# Altium PCB PCB_V2.PcbDoc
Units mm, origin at the board's own origin, x right, y up, seen from the top; angles counter-clockwise.
Board outline 76.5 x 99.5 mm, 2 copper layers (Top Layer, Bottom Layer), stack 0.08 mm thick; 12 components, 10 nets, 39 pads, 30 vias.
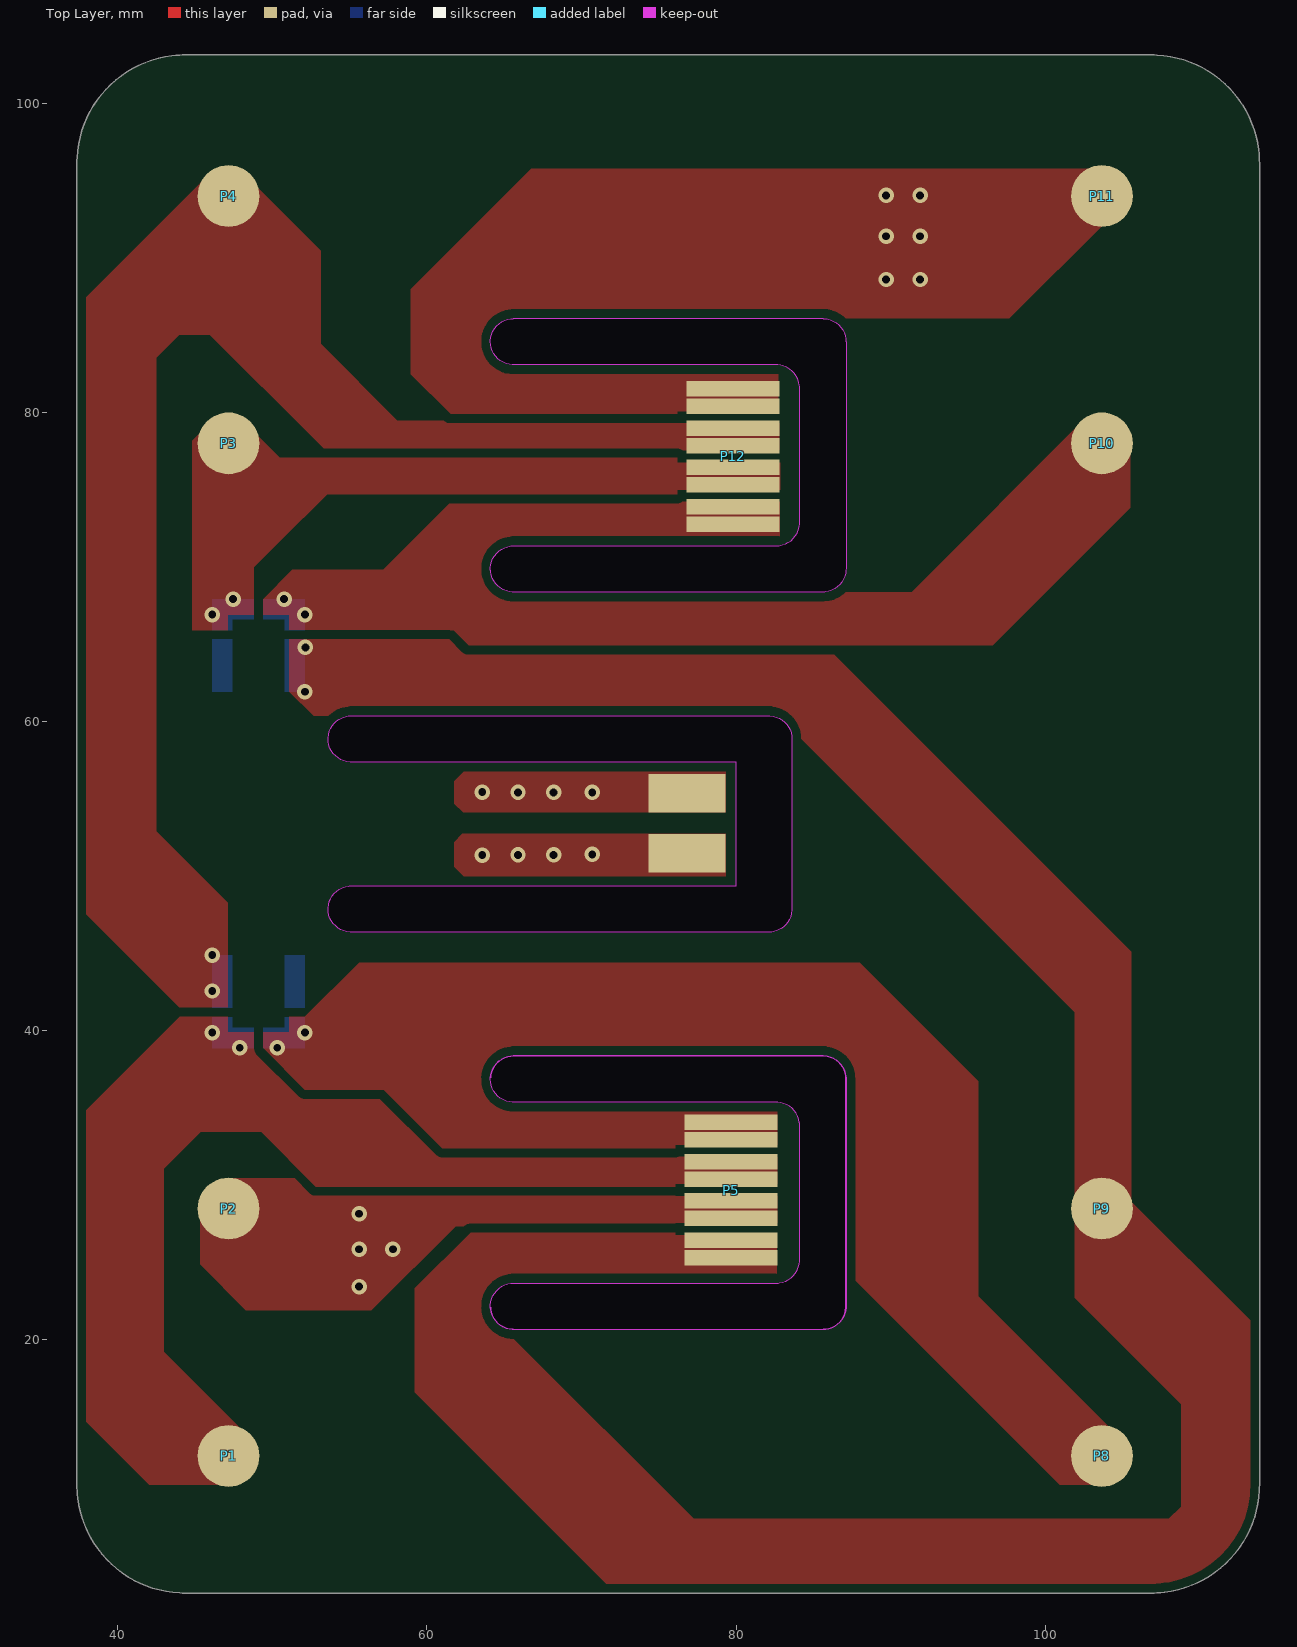
[diagram p0: Top Layer view]
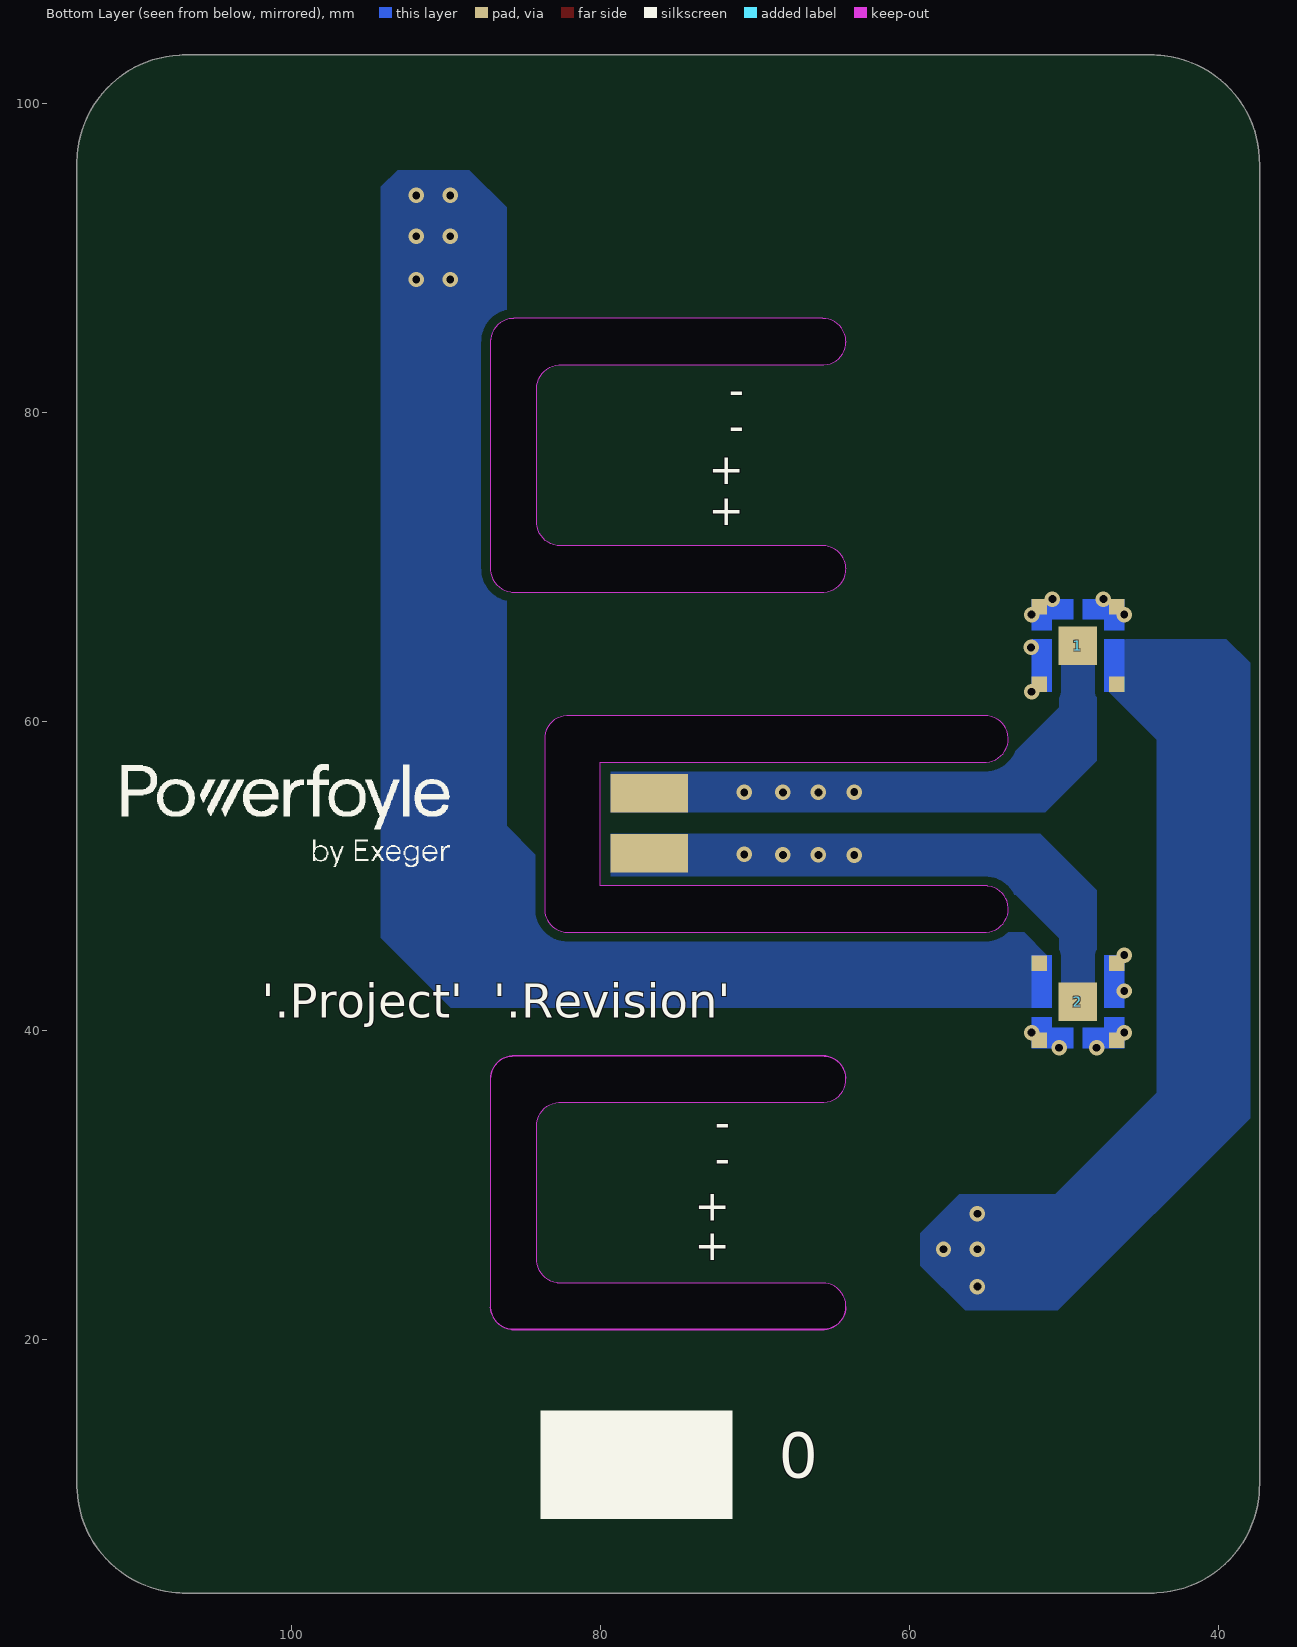
[diagram p1: Bottom Layer view, seen from below]

## Layer stack, top to bottom
Top Solder: solder mask 0.0102, Solder Resist, Dk 3.5
Top Layer: signal copper 0.035
Dielectric 1: dielectric 0.01, Kapton, Dk 4.8
Bottom Layer: signal copper 0.035
Bottom Solder: solder mask 0.0102, Solder Resist, Dk 3.5

## Board outline
37.41,9.771 cw(c44.399,10.623) 37.368,10.258 cw(c44.472,10.627) 37.358,10.627 37.358,96.127 cw(c44.474,96.127) 37.367,96.484 cw(c44.36,96.126) 43.502,103.075 cw(c44.354,96.086) 43.989,103.117 cw(c44.358,96.013) 44.358,103.127 106.858,103.127 cw(c106.859,96.012) 107.216,103.118 cw(c106.857,96.125) 113.806,96.983 cw(c106.818,96.131) 113.849,96.496 cw(c106.744,96.127) 113.858,96.127 113.858,10.627 cw(c106.743,10.627) 113.849,10.27 cw(c106.857,10.628) 107.715,3.679 cw(c106.863,10.668) 107.227,3.637 cw(c106.859,10.741) 106.858,3.627 44.358,3.627 cw(c44.358,10.742) 44.001,3.636 cw(c44.359,10.629)
cut-out: 64.119,21.993 cw(c65.617,22.176) 64.11,22.098 64.11,22.254 cw(c65.609,22.177) 65.425,23.666 cw(c65.607,22.168) 65.529,23.675 cw(c65.608,22.153) 65.608,23.677 82.608,23.677 ccw(c82.608,25.201) 82.687,23.679 ccw(c82.609,25.186) 82.792,23.688 ccw(c82.608,25.177) 84.106,25.1 ccw(c82.584,25.177) 84.108,25.177 84.108,33.877 ccw(c82.584,33.877) 84.106,33.956 ccw(c82.6,33.878) 84.097,34.061 ccw(c82.608,33.877) 82.685,35.375 ccw(c82.608,33.852) 82.608,35.377 65.608,35.377 cw(c65.608,36.902) 65.532,35.379 cw(c65.608,36.877) 64.119,36.693 cw(c65.617,36.876) 64.11,36.798 64.11,36.954 cw(c65.609,36.877) 65.425,38.366 cw(c65.607,36.868) 65.529,38.375 cw(c65.608,36.853) 65.608,38.377 85.608,38.377 cw(c85.608,36.852) 85.685,38.375 cw(c85.608,36.877) 87.097,37.061 cw(c85.6,36.878) 87.106,36.956 cw(c85.584,36.877) 87.108,36.877 87.108,22.177 cw(c85.584,22.177) 87.106,22.1 cw(c85.608,22.177) 85.792,20.688 cw(c85.609,22.186) 85.687,20.679 cw(c85.608,22.201) 85.608,20.677 65.608,20.677 cw(c65.608,22.202) 65.532,20.679 cw(c65.608,22.177)
cut-out: 65.531,20.672 cw(c65.608,22.177) 64.113,21.993 cw(c64.119,21.993) 64.113,21.993 cw(c65.617,22.176) 64.104,22.098 cw(c64.11,22.098) 64.117,22.098 ccw(c65.617,22.176) 64.126,21.994 ccw(c65.617,22.176) 64.126,21.994 ccw(c64.119,21.993) 64.126,21.994 ccw(c65.608,22.177) 65.532,20.686 ccw(c65.608,22.177) 65.532,20.686 ccw(c65.608,22.202) 65.608,20.684 cw(c65.608,20.677) 65.608,20.684 85.608,20.684 ccw(c85.608,22.201) 85.687,20.686 ccw(c85.608,22.201) 85.687,20.686 cw(c85.687,20.679) 85.687,20.686 ccw(c85.609,22.186) 85.791,20.695 cw(c85.792,20.688) 85.791,20.695 ccw(c85.608,22.177) 87.1,22.101 ccw(c85.608,22.177) 87.1,22.101 ccw(c85.584,22.177) 87.102,22.177 ccw(c85.584,22.177) 87.102,22.177 cw(c87.108,22.177) 87.102,22.177 87.102,36.877 ccw(c85.584,36.877) 87.102,36.877 ccw(c85.584,36.877) 87.099,36.956 cw(c87.106,36.956) 87.099,36.956 cw(c87.106,36.956) 87.099,36.956 ccw(c85.6,36.878) 87.09,37.06 cw(c87.097,37.061) 87.09,37.06 ccw(c85.608,36.877) 85.684,38.368 cw(c85.685,38.375) 85.684,38.368 cw(c85.608,36.852) 85.684,38.368 ccw(c85.608,36.852) 85.608,38.37 ccw(c85.608,36.852) 85.608,38.37 65.608,38.37 cw(c65.608,36.853) 65.608,38.37 ccw(c65.608,36.853) 65.53,38.368 cw(c65.529,38.375) 65.529,38.368 cw(c65.607,36.868) 65.53,38.368 65.529,38.368 ccw(c65.607,36.868) 65.426,38.359 ccw(c65.607,36.868) 65.426,38.359 ccw(c65.425,38.366) 65.426,38.359 ccw(c65.609,36.877) 64.117,36.953 cw(c64.11,36.954) 64.103,36.954 cw(c65.609,36.877) 65.424,38.373 cw(c65.425,38.366) 65.424,38.373 cw(c65.607,36.868) 65.529,38.382 cw(c65.608,36.853) 65.608,38.384 85.608,38.384 cw(c85.608,36.852) 85.685,38.382 cw(c85.685,38.375) 85.685,38.382 cw(c85.608,36.877) 87.104,37.061 cw(c87.097,37.061) 87.104,37.061 cw(c85.6,36.878) 87.113,36.956 cw(c85.584,36.877) 87.115,36.877 cw(c85.584,36.877) 87.115,36.877 87.115,22.177 cw(c87.108,22.177) 87.115,22.177 ccw(c85.584,22.177) 87.115,22.177 ccw(c85.584,22.177) 87.115,22.177 cw(c85.584,22.177) 87.113,22.1 ccw(c87.106,22.1) 87.113,22.1 cw(c87.106,22.1) 87.113,22.1 cw(c85.608,22.177) 85.793,20.681 cw(c85.792,20.688) 85.793,20.681 cw(c85.609,22.186) 85.688,20.672 cw(c85.608,22.201) 85.608,20.67 65.608,20.67 cw(c65.608,20.677) 65.608,20.67 ccw(c65.608,22.202) 65.608,20.67 cw(c65.608,22.202)
cut-out: 65.531,20.672 cw(c65.608,22.177) 64.113,21.993 cw(c64.119,21.993) 64.113,21.993 cw(c65.617,22.176) 64.104,22.098 cw(c64.11,22.098) 64.117,22.098 ccw(c65.617,22.176) 64.126,21.994 ccw(c65.617,22.176) 64.126,21.994 ccw(c64.119,21.993) 64.126,21.994 ccw(c65.608,22.177) 65.532,20.686 ccw(c65.608,22.177) 65.532,20.686 ccw(c65.608,22.202) 65.608,20.684 cw(c65.608,20.677) 65.608,20.684 85.608,20.684 ccw(c85.608,22.201) 85.687,20.686 ccw(c85.608,22.201) 85.687,20.686 cw(c85.687,20.679) 85.687,20.686 ccw(c85.609,22.186) 85.791,20.695 cw(c85.792,20.688) 85.791,20.695 ccw(c85.608,22.177) 87.1,22.101 ccw(c85.608,22.177) 87.1,22.101 ccw(c85.584,22.177) 87.102,22.177 ccw(c85.584,22.177) 87.102,22.177 cw(c87.108,22.177) 87.102,22.177 87.102,36.877 ccw(c85.584,36.877) 87.102,36.877 ccw(c85.584,36.877) 87.099,36.956 cw(c87.106,36.956) 87.099,36.956 cw(c87.106,36.956) 87.099,36.956 ccw(c85.6,36.878) 87.09,37.06 cw(c87.097,37.061) 87.09,37.06 ccw(c85.608,36.877) 85.684,38.368 cw(c85.685,38.375) 85.684,38.368 cw(c85.608,36.852) 85.684,38.368 ccw(c85.608,36.852) 85.608,38.37 ccw(c85.608,36.852) 85.608,38.37 65.608,38.37 cw(c65.608,36.853) 65.608,38.37 ccw(c65.608,36.853) 65.53,38.368 cw(c65.529,38.375) 65.529,38.368 cw(c65.607,36.868) 65.53,38.368 65.529,38.368 ccw(c65.607,36.868) 65.426,38.359 ccw(c65.607,36.868) 65.426,38.359 ccw(c65.425,38.366) 65.426,38.359 ccw(c65.609,36.877) 64.117,36.953 cw(c64.11,36.954) 64.103,36.954 cw(c65.609,36.877) 65.424,38.373 cw(c65.425,38.366) 65.424,38.373 cw(c65.607,36.868) 65.529,38.382 cw(c65.608,36.853) 65.608,38.384 85.608,38.384 cw(c85.608,36.852) 85.685,38.382 cw(c85.685,38.375) 85.685,38.382 cw(c85.608,36.877) 87.104,37.061 cw(c87.097,37.061) 87.104,37.061 cw(c85.6,36.878) 87.113,36.956 cw(c85.584,36.877) 87.115,36.877 cw(c85.584,36.877) 87.115,36.877 87.115,22.177 cw(c87.108,22.177) 87.115,22.177 ccw(c85.584,22.177) 87.115,22.177 ccw(c85.584,22.177) 87.115,22.177 cw(c85.584,22.177) 87.113,22.1 ccw(c87.106,22.1) 87.113,22.1 cw(c87.106,22.1) 87.113,22.1 cw(c85.608,22.177) 85.793,20.681 cw(c85.792,20.688) 85.793,20.681 cw(c85.609,22.186) 85.688,20.672 cw(c85.608,22.201) 85.608,20.67 65.608,20.67 cw(c65.608,20.677) 65.608,20.67 ccw(c65.608,22.202) 65.608,20.67 cw(c65.608,22.202)
cut-out: 53.619,47.693 cw(c55.117,47.876) 53.61,47.798 cw(c55.133,47.877) 53.608,47.877 cw(c55.133,47.877) 53.61,47.954 cw(c55.109,47.877) 54.925,49.366 cw(c55.107,47.868) 55.029,49.375 cw(c55.108,47.853) 55.108,49.377 80.008,49.377 80.008,57.377 55.108,57.377 cw(c55.108,58.902) 55.032,57.379 cw(c55.108,58.877) 53.619,58.693 cw(c55.117,58.876) 53.61,58.798 cw(c55.133,58.877) 53.608,58.877 cw(c55.133,58.877) 53.61,58.954 cw(c55.109,58.877) 54.925,60.366 cw(c55.107,58.868) 55.029,60.375 cw(c55.108,58.853) 55.108,60.377 82.108,60.377 cw(c82.108,58.852) 82.185,60.375 cw(c82.108,58.877) 83.597,59.061 cw(c82.1,58.878) 83.606,58.956 cw(c82.084,58.877) 83.608,58.877 83.608,47.877 cw(c82.084,47.877) 83.606,47.8 cw(c82.108,47.877) 82.292,46.388 cw(c82.109,47.886) 82.187,46.379 cw(c82.108,47.901) 82.108,46.377 55.108,46.377 cw(c55.108,47.902) 55.032,46.379 cw(c55.108,47.877)
cut-out: 64.11,69.798 cw(c65.633,69.877) 64.108,69.877 cw(c65.633,69.877) 64.11,69.954 cw(c65.609,69.877) 65.425,71.366 cw(c65.607,69.868) 65.529,71.375 cw(c65.608,69.853) 65.608,71.377 82.608,71.377 ccw(c82.608,72.901) 82.687,71.379 ccw(c82.609,72.886) 82.792,71.388 ccw(c82.608,72.877) 84.106,72.8 ccw(c82.584,72.877) 84.108,72.877 84.108,81.577 ccw(c82.584,81.577) 84.106,81.656 ccw(c82.6,81.578) 84.097,81.761 ccw(c82.608,81.577) 82.685,83.075 ccw(c82.608,81.552) 82.608,83.077 65.608,83.077 cw(c65.608,84.602) 65.532,83.079 cw(c65.608,84.577) 64.119,84.393 cw(c65.617,84.576) 64.11,84.498 cw(c65.633,84.577) 64.108,84.577 cw(c65.633,84.577) 64.11,84.654 cw(c65.609,84.577) 65.425,86.066 cw(c65.607,84.568) 65.529,86.075 cw(c65.608,84.553) 65.608,86.077 85.608,86.077 cw(c85.608,84.552) 85.685,86.075 cw(c85.608,84.577) 87.097,84.761 cw(c85.6,84.578) 87.106,84.656 cw(c85.584,84.577) 87.108,84.577 87.108,69.877 cw(c85.584,69.877) 87.106,69.8 cw(c85.608,69.877) 85.792,68.388 cw(c85.609,69.886) 85.687,68.379 cw(c85.608,69.901) 85.608,68.377 65.608,68.377 cw(c65.608,69.902) 65.532,68.379 cw(c65.608,69.877) 64.119,69.693 cw(c65.617,69.876)

## Design rules (kind name [scope] priority, off if disabled: settings)
BoardOutlineClearance [All] p1: gap=0.6 ignorepadtopadclearanceinfootprint=FALSE
Clearance "Clearance to footprint" [HasFootprint('Customer_2022_solder_short_ISOL_0.4_S') OR HasFootprint('Customer_2026_solder_short_ISOL_0.4') OR HasFootprint('EXEGER_IV_10_PIN_ISOL_0.4')] p1: gap=0.4 ignorepadtopadclearanceinfootprint=FALSE
Clearance "Clearance to cell connections" [HasFootprint('Cell_pad_4mm_SM0.5mm')] p2: gap=0.6 ignorepadtopadclearanceinfootprint=FALSE
Clearance [All] p3: gap=0.6 ignorepadtopadclearanceinfootprint=FALSE
DiffPairsRouting [All] p1: maxlimit=0.254 minlimit=0.254 mostfreqgap=0.254 substack1={AC398A8C-2EBD-4929-A576-1C4F7B57599D} toplayer_{ac398a8c-2ebd-4929-a576-1c4f7b57599d}_minwidth=0.381 toplayer_{ac398a8c-2ebd-4929-a576-1c4f7b57599d}_maxwidth=0.381 toplayer_{ac398a8c-2ebd-4929-a576-1c4f7b57599d}_prefwidth=0.381 bottomlayer_{ac398a8c-2ebd-4929-a576-1c4f7b57599d}_minwidth=0.381 bottomlayer_{ac398a8c-2ebd-4929-a576-1c4f7b57599d}_maxwidth=0.381 bottomlayer_{ac398a8c-2ebd-4929-a576-1c4f7b57599d}_prefwidth=0.381 substack2={C3FBE846-BD83-49AA-845B-1BEE8A776ADA} toplayer_{c3fbe846-bd83-49aa-845b-1bee8a776ada}_minwidth=0.381 toplayer_{c3fbe846-bd83-49aa-845b-1bee8a776ada}_maxwidth=0.381 toplayer_{c3fbe846-bd83-49aa-845b-1bee8a776ada}_prefwidth=0.381 bottomlayer_{c3fbe846-bd83-49aa-845b-1bee8a776ada}_minwidth=0.381 bottomlayer_{c3fbe846-bd83-49aa-845b-1bee8a776ada}_maxwidth=0.381 bottomlayer_{c3fbe846-bd83-49aa-845b-1bee8a776ada}_prefwidth=0.381 substack3={068A34C2-B61F-40AE-8550-B44704E20CBD} toplayer_{068a34c2-b61f-40ae-8550-b44704e20cbd}_minwidth=0.381 toplayer_{068a34c2-b61f-40ae-8550-b44704e20cbd}_maxwidth=0.381 toplayer_{068a34c2-b61f-40ae-8550-b44704e20cbd}_prefwidth=0.381 bottomlayer_{068a34c2-b61f-40ae-8550-b44704e20cbd}_minwidth=0.381 bottomlayer_{068a34c2-b61f-40ae-8550-b44704e20cbd}_maxwidth=0.381 bottomlayer_{068a34c2-b61f-40ae-8550-b44704e20cbd}_prefwidth=0.381 toplayer_minwidth=0.381 toplayer_maxwidth=0.381 toplayer_prefwidth=0.381 bottomlayer_minwidth=0.381 bottomlayer_maxwidth=0.381 bottomlayer_prefwidth=0.381 substack4={1DBF04A3-A739-4845-80F4-67AE6DF34821} toplayer_{1dbf04a3-a739-4845-80f4-67ae6df34821}_minwidth=0.381 toplayer_{1dbf04a3-a739-4845-80f4-67ae6df34821}_maxwidth=0.381 toplayer_{1dbf04a3-a739-4845-80f4-67ae6df34821}_prefwidth=0.381 bottomlayer_{1dbf04a3-a739-4845-80f4-67ae6df34821}_minwidth=0.381 bottomlayer_{1dbf04a3-a739-4845-80f4-67ae6df34821}_maxwidth=0.381 bottomlayer_{1dbf04a3-a739-4845-80f4-67ae6df34821}_prefwidth=0.381 substack5={706D0DFD-092C-4A59-9570-597311E816E1} toplayer_{706d0dfd-092c-4a59-9570-597311e816e1}_minwidth=0.381 toplayer_{706d0dfd-092c-4a59-9570-597311e816e1}_maxwidth=0.381 toplayer_{706d0dfd-092c-4a59-9570-597311e816e1}_prefwidth=0.381 bottomlayer_{706d0dfd-092c-4a59-9570-597311e816e1}_minwidth=0.381 bottomlayer_{706d0dfd-092c-4a59-9570-597311e816e1}_maxwidth=0.381 bottomlayer_{706d0dfd-092c-4a59-9570-597311e816e1}_prefwidth=0.381 substack6={F6441547-04AD-42D8-8F2E-114EB13474D3} toplayer_{f6441547-04ad-42d8-8f2e-114eb13474d3}_minwidth=0.381 toplayer_{f6441547-04ad-42d8-8f2e-114eb13474d3}_maxwidth=0.381 toplayer_{f6441547-04ad-42d8-8f2e-114eb13474d3}_prefwidth=0.381 bottomlayer_{f6441547-04ad-42d8-8f2e-114eb13474d3}_minwidth=0.381 bottomlayer_{f6441547-04ad-42d8-8f2e-114eb13474d3}_maxwidth=0.381 bottomlayer_{f6441547-04ad-42d8-8f2e-114eb13474d3}_prefwidth=0.381 substack7={D3D7B19F-2A18-4F5B-8A84-D7E783B0B577} toplayer_{d3d7b19f-2a18-4f5b-8a84-d7e783b0b577}_minwidth=0.381 toplayer_{d3d7b19f-2a18-4f5b-8a84-d7e783b0b577}_maxwidth=0.381 toplayer_{d3d7b19f-2a18-4f5b-8a84-d7e783b0b577}_prefwidth=0.381 bottomlayer_{d3d7b19f-2a18-4f5b-8a84-d7e783b0b577}_minwidth=0.381 bottomlayer_{d3d7b19f-2a18-4f5b-8a84-d7e783b0b577}_maxwidth=0.381 bottomlayer_{d3d7b19f-2a18-4f5b-8a84-d7e783b0b577}_prefwidth=0.381 substack8={33F0C8AE-5BAA-4F54-8420-C15B5188DF2B} toplayer_{33f0c8ae-5baa-4f54-8420-c15b5188df2b}_minwidth=0.381 toplayer_{33f0c8ae-5baa-4f54-8420-c15b5188df2b}_maxwidth=0.381 toplayer_{33f0c8ae-5baa-4f54-8420-c15b5188df2b}_prefwidth=0.381 bottomlayer_{33f0c8ae-5baa-4f54-8420-c15b5188df2b}_minwidth=0.381 bottomlayer_{33f0c8ae-5baa-4f54-8420-c15b5188df2b}_maxwidth=0.381 bottomlayer_{33f0c8ae-5baa-4f54-8420-c15b5188df2b}_prefwidth=0.381 substack9={5DEA7FFC-9C65-4E3C-AA6C-196D072506BA} toplayer_{5dea7ffc-9c65-4e3c-aa6c-196d072506ba}_minwidth=0.381 toplayer_{5dea7ffc-9c65-4e3c-aa6c-196d072506ba}_maxwidth=0.381 toplayer_{5dea7ffc-9c65-4e3c-aa6c-196d072506ba}_prefwidth=0.381 bottomlayer_{5dea7ffc-9c65-4e3c-aa6c-196d072506ba}_minwidth=0.381 bottomlayer_{5dea7ffc-9c65-4e3c-aa6c-196d072506ba}_maxwidth=0.381 bottomlayer_{5dea7ffc-9c65-4e3c-aa6c-196d072506ba}_prefwidth=0.381 maxuncoupledlength=12.7
PolygonConnect [All] p1: connectstyle=Direct reliefconductorwidth=0.254 reliefentries=4 polygonreliefangle="90 Angle" airgapwidth=0.254
RoutingVias [All] p1: holewidth=0.5 width=1 viastyle="Through Hole" minholewidth=0.5 minwidth=1 maxholewidth=0.5 maxwidth=1
SolderMaskExpansion [All] p1: expansion=0.102 istentingtop=FALSE
UnRoutedNet [All] p1: checkbadconnections=TRUE
Width [All] p1: maxlimit=10 minlimit=0.2 preferedwidth=2 substack1={AC398A8C-2EBD-4929-A576-1C4F7B57599D} substack2={C3FBE846-BD83-49AA-845B-1BEE8A776ADA} substack3={068A34C2-B61F-40AE-8550-B44704E20CBD} substack4={1DBF04A3-A739-4845-80F4-67AE6DF34821} substack5={706D0DFD-092C-4A59-9570-597311E816E1} substack6={F6441547-04AD-42D8-8F2E-114EB13474D3} substack7={D3D7B19F-2A18-4F5B-8A84-D7E783B0B577} substack8={33F0C8AE-5BAA-4F54-8420-C15B5188DF2B} substack9={5DEA7FFC-9C65-4E3C-AA6C-196D072506BA}
28 further rules are at their usual default settings.

## Components (designator, comment, footprint, x,y, rotation, side; value= is the part's Value field where it differs from the comment)
1 "Cell Connection - 5P" 4-To-1-Connector 49.106,64.917 r270 bottom
2 "Cell Connection - 5P" 4-To-1-Connector 49.106,41.884 r90 bottom
P1 "Cell connection" Cell_pad_4mm_SM0.5mm#1 47.164,12.5 r90 top
P2 "Cell connection" Cell_pad_4mm_SM0.5mm#1 47.164,28.5 r90 top
P3 "Cell connection" Cell_pad_4mm_SM0.5mm#1 47.164,78 r90 top
P4 "Cell connection" Cell_pad_4mm_SM0.5mm#1 47.164,94 r90 top
P5 "Exeger IV-test" EXEGER_IV_8_PIN_NO_STIFF_ISOL_0.4 79.675,25.254 r180 top
P8 "Cell connection" Cell_pad_4mm_SM0.5mm#1 103.664,12.5 r0 top
P9 "Cell connection" Cell_pad_4mm_SM0.5mm#1 103.664,28.5 r0 top
P10 "Cell connection" Cell_pad_4mm_SM0.5mm#1 103.664,78 r0 top
P11 "Cell connection" Cell_pad_4mm_SM0.5mm#2 103.664,94 r0 top
P12 "Exeger IV-test" EXEGER_IV_8_PIN_NO_STIFF_ISOL_0.4 79.791,72.706 r180 top

## Footprints (in the part's own frame and the unit in brackets; to place one, negate y for a bottom-side part, rotate by r counter-clockwise, add the part's x,y. Pads: shape width x height; smd on the part's side, far side on the other; paste and mask are expansions set on the pad)
4-To-1-Connector [mm]
  rect 1x1 smd mask+0.05: 1(-2.5,2.5) 2(-2.5,-2.5) 3(2.5,-2.5) 4(2.5,2.5)
  rect 2.5x2.5 smd mask+0.05: 5(0,0)
  Top Layer region: 3,-3 -0.4,-3 -0.4,-1.7 3,-1.7
  Top Layer region: -3,-3 -1,-3 -1,-1.7 -1.7,-1.7 -1.7,-0.3 -3,-0.3
  Top Layer region: -3,3 -3,0.3 -1.7,0.3 -1.7,1.7 -1,1.7 -1,3
  Top Layer region: 3,3 -0.4,3 -0.4,1.7 3,1.7
Cell_pad_4mm_SM0.5mm#1 [mm]
  round 4 smd mask+0: 1(0,0)
Cell_pad_4mm_SM0.5mm#2 [mm]
  round 4 smd: 1(0,0)
EXEGER_IV_8_PIN_NO_STIFF_ISOL_0.4 [mm] "TE  4-487576-9 mating"
  rect 6x1 smd paste-2 mask+0.1: 1(0,-0.066) 2(0,-1.204) 3(0,-2.606) 4(0,-3.744) 5(0,-5.146) 6(0,-6.284) 7(0,-7.686) 8(0,-8.824)

## Part data
P1 P2 P3 P4 P8 P9 P10 P11: library part "Cell connection 1P"
P5 P12: library part "Header 8", "Header, 8-Pin"

## Free pads (board coordinates)
  rect 5x2.5 smd far side mask+0.05: 1(76.828,55.363) 1(76.828,55.363) 2(76.828,51.491)
  rect 5x2.5 smd mask+0.05: 3(76.828,55.363) 4(76.828,51.491)

## Via types
v1: diameter 1, hole 0.5, Top Layer to Bottom Layer, 30 vias

## Nets (pads, with @x,y where several pads share a name; then routed paths per layer and width w, separated by ;. In a path a pad name is that pad's centre, name@x,y a point inside that pad or via, vN(x,y) a via of type N, cw(c..) or ccw(c..) an arc to the next point about the centre after c; other vN are vias at no path point)
N_1: 2.2 P1.1 P5.5 P5.6
  other v1: 47.897,38.898 46.106,39.884
N_2: 2.3 P4.1 P12.5 P12.6
  other v1: 46.106,42.575 46.106,44.898
N_3: 2.1 P5.7 P5.8 P8.1
  other v1: 50.325,38.907 52.106,39.884
N_4: 2.4 P11.1 P12.7 P12.8
  other v1: 89.7,88.6 91.9,88.6 89.7,91.4 91.9,91.4 89.7,94.037 91.9,94.037
N_Out: 2.5 pad.2 pad.4
  other v1: 63.579,51.365 65.89,51.376 68.19,51.376 70.694,51.409
P_1: 1.4 P2.1 P5.3 P5.4
  other v1: 55.608,23.453 55.608,25.861 57.8,25.861 55.608,28.171
P_2: 1.1 P3.1 P12.3 P12.4
  other v1: 46.106,66.925 47.456,67.925
P_3: 1.3 P5.1 P5.2 P9.1
  other v1: 52.106,61.925 52.137,64.796
P_4: 1.2 P10.1 P12.1 P12.2
  other v1: 52.106,66.925 50.756,67.925
P_Out: 1.5 pad.1 pad.3
  other v1: 65.89,55.418 68.19,55.418 70.694,55.418 63.579,55.443
copper on no net: | length 0.6
  Bottom Layer w0.2: 47.356,67.825 47.456,67.925 ; 50.756,67.925 50.931,67.925 ; 51.931,66.925 52.106,66.925 ; 52.106,61.925 52.137,61.956 ; 52.137,64.796 52.168,64.827

## Polygon pours and split planes (outlines as drawn)
no net on PSA "NONET_L-01_P-001" (solid): 51.623,102.95 cw(c51.623,100.41) 53.419,102.206 55.806,99.819 cw(c54.01,98.023) 56.55,98.023 56.55,82.877 ccw(c59.09,82.877) 57.294,81.081 59.631,78.744 ccw(c61.427,80.54) 61.427,78 89.4,78 ccw(c89.4,80.54) 91.197,78.744 93.534,81.081 ccw(c91.738,82.877) 94.278,82.877 94.278,98.023 cw(c96.818,98.023) 95.022,99.819 97.409,102.206 cw(c99.205,100.41) 99.205,102.95 108.398,102.95 cw(c108.398,100.41) 110.195,102.206 112.959,99.442 cw(c111.163,97.646) 113.703,97.646 113.703,8.854 cw(c111.163,8.854) 112.959,7.058 110.195,4.294 cw(c108.398,6.09) 108.398,3.55 99.205,3.55 cw(c99.205,6.09) 97.409,4.294 95.022,6.681 cw(c96.818,8.477) 94.278,8.477 94.278,23.623 ccw(c91.738,23.623) 93.534,25.419 91.197,27.756 ccw(c89.4,25.96) 89.4,28.5 61.427,28.5 ccw(c61.427,25.96) 59.631,27.756 57.294,25.419 ccw(c59.09,23.623) 56.55,23.623 56.55,8.477 cw(c54.01,8.477) 55.806,6.681 53.419,4.294 cw(c51.623,6.09) 51.623,3.55 42.429,3.55 cw(c42.429,6.09) 40.633,4.294 37.869,7.058 cw(c39.665,8.854) 37.125,8.854 37.125,97.646 cw(c39.665,97.646) 37.869,99.442 40.633,102.206 cw(c42.429,100.41) 42.429,102.95
P_3 on Top Layer "P_3_L01_P018" (solid, pour order 18): 101.9,28.496 101.9,41.212 83.226,59.885 55.434,59.885 54.951,60.369 52.662,60.369 51.106,61.925 51.106,65.325 62.3,65.325 62.7,64.925 85.75,64.925 105.575,45.1 105.575,28.15
N_2 on Top Layer "N_2_L01_P029" (solid, pour order 29): 45.797,95.288 36.3,85.791 36.3,49.196 43.998,41.498 47.106,41.498 47.106,44.898 47.106,48.294 42.5,52.9 42.5,83.551 43.989,85.041 48.264,85.041 49.406,86.183 48.007,87.582 48.007,94.507
N_1 on Top Layer "N_1_L01_P025" (solid, pour order 25): 48.25,13.95 42.975,19.225 42.975,31.075 45.375,33.475 49.275,33.475 52.823,29.927 82.672,29.927 82.672,32.037 61.372,32.037 57.214,36.195 51.509,36.195 48.806,38.898 48.806,39.898 47.106,39.898 47.106,40.898 46.106,40.898 43.998,40.898 36.825,33.725 36.825,15.848 42.046,10.627 47.469,10.627
P_2 on Top Layer "P_2_L01_P035" (solid, pour order 35): 45.375,78.733 44.803,78.161 44.803,75.546 48.707,75.546 47.725,76.528 47.725,79.279
P_Out on Top Layer "P_OUT_L01_P034" (solid, pour order 34): 79.337,54.121 62.333,54.121 61.755,54.7 61.755,56.135 62.385,56.765 79.337,56.765
N_Out on Top Layer "N_OUT_L01_P033" (solid, pour order 33): 79.338,52.741 62.296,52.741 61.755,52.2 61.755,50.619 62.385,49.989 79.338,49.989
P_1 on Top Layer "P_1_L01_P026" (solid, pour order 26): 47,30.45 52.3,30.45 53.282,29.468 82.649,29.468 82.649,27.377 82.664,27.362 61.853,27.362 56.408,21.918 48.292,21.918 45.322,24.887 45.322,28.806
N_3 on Top Layer "N_3_L01_P024" (solid, pour order 24): 105.281,13.233 95.677,22.837 95.677,36.723 88,44.4 55.608,44.4 52.106,40.898 51.106,40.898 51.106,39.898 49.406,39.898 49.406,38.898 52.109,36.195 57.214,36.195 61.001,32.408 82.676,32.408 82.676,37.023 85.608,34.091 85.608,25.942 100.923,10.627 103.969,10.627
P_3 on Top Layer "P_3_L01_P023" (solid, pour order 23): 101.9,28.496 101.9,22.739 108.8,15.839 108.8,9.225 108,8.425 77.258,8.425 64.595,21.088 66.05,22.544 82.618,22.544 82.618,26.93 82.615,26.933 62.821,26.933 59.22,23.332 59.22,16.63 75.025,0.825 109.075,0.825 115.125,6.875 115.125,19.389 105.281,29.233
P_2 on Top Layer "P_2_L01_P022" (solid, pour order 22): 48.806,66.925 48.806,69.989 55.271,76.453 44.803,76.453 44.803,65.925 47.106,65.925 47.106,66.925
P_4 on Top Layer "P_4_L01_P021" (solid, pour order 21): 51.106,65.925 64.231,65.925 64.231,66.319 58.95,71.6 57.162,69.812 51.293,69.812 49.406,67.925 49.406,66.925 51.106,66.925
N_2 on Top Layer "N_2_L01_P020" (solid, pour order 20): 45.375,94.225 45.375,85.621 53.731,77.265 82.649,77.265 82.791,77.407 82.791,79.473 58.078,79.473 53.118,84.433 53.118,90.474 48.803,94.79
N_4 on Top Layer "N_4_L01_P019" (solid, pour order 19): 103.9,92.3 97.677,86.077 82.727,86.077 82.727,79.93 82.696,79.9 61.527,79.9 58.95,82.477 58.95,87.975 66.75,95.775 104.264,95.775
P_4 on Top Layer "P_4_L01_P014" (solid, pour order 14): 102.655,79.675 91.357,68.377 82.815,68.377 82.815,74.402 82.812,74.405 61.755,74.405 58.95,71.6 58.95,68.675 62.7,64.925 96.586,64.925 105.492,73.831 105.492,78.003
P_2 on Top Layer "P_2_L01_P013" (solid, pour order 13): 47.725,79.825 50.488,77.062 82.856,77.062 82.856,74.726 82.864,74.718 48.007,74.718 46.35,76.375 46.428,76.453 46.428,78.733
P_1 on Bottom Layer "P_1_L02_P027" (solid, pour order 27): 50.398,21.918 35,37.316 35,60.825 39.5,65.325 47.406,65.325 47.406,62.225 43.998,58.817 43.998,35.992 50.567,29.422 56.79,29.422 59.293,26.919 59.293,24.802 56.408,21.918
P_Out on Bottom Layer "P_OUT_L02_P032" (solid, pour order 32): 47.897,66.122 47.897,57.46 51.235,54.121 79.337,54.121 79.337,57.867 53.376,57.869 50.325,60.919 50.325,65.974 50.199,66.101
N_Out on Bottom Layer "N_OUT_L02_P031" (solid, pour order 31): 47.897,40.898 47.897,49.097 51.541,52.741 79.338,52.741 79.338,49.09 79.055,48.806 53.132,48.806 50.325,46 50.325,41.574 49.65,40.898
N_4 on Bottom Layer "N_4_L02_P030" (solid, pour order 30): 88.473,95.68 93.12,95.68 94.2,94.6 94.2,46.031 89.667,41.498 51.106,41.498 51.106,44.898 52.585,46.377 79.195,46.377 86.068,53.25 86.068,93.275

## Silkscreen, mask and mechanical layers (free items; w line width, h text height)
Bottom Overlay:
  drawing of 21 lines, arcs and shapes, not listed
  text "-" at 70.694,81.973 h2 r180
  text "-" at 70.694,79.648 h2 r180
  text "+" at 70.694,77.062 h2 r180
  text "+" at 70.694,74.423 h2 r180
  text "'.Project'  '.Revision'" at 101.9,40.85 h2.2
  text "-" at 71.6,34.597 h2 r180
  text "-" at 71.6,32.272 h2 r180
  text "+" at 71.6,29.422 h2 r180
  text "+" at 71.6,26.872 h2 r180
  text "0" at 68.45,10.125 h5
Cell drawing:
  drawing of 172 lines, arcs and shapes, not listed
Mech notes:
  rectangle: 203.1,7.25 230.1,17.75
PSA:
  pour cut-out: 99.27,94.247 99.27,96.325 cw(c101.81,96.325) 101.81,98.865 105.485,98.865 cw(c105.485,96.325) 108.025,96.325 108.025,91.626 cw(c105.485,91.626) 105.485,89.086 101.807,89.086 cw(c101.807,91.626) 99.267,91.626 99.267,94.247
  pour cut-out: 99.27,78.247 99.27,80.325 cw(c101.81,80.325) 101.81,82.865 105.485,82.865 cw(c105.485,80.325) 108.025,80.325 108.025,75.626 cw(c105.485,75.626) 105.485,73.086 101.807,73.086 cw(c101.807,75.626) 99.267,75.626 99.267,78.247
  pour cut-out: 99.27,28.747 99.27,30.825 cw(c101.81,30.825) 101.81,33.365 105.485,33.365 cw(c105.485,30.825) 108.025,30.825 108.025,26.126 cw(c105.485,26.126) 105.485,23.586 101.807,23.586 cw(c101.807,26.126) 99.267,26.126 99.267,28.747
  pour cut-out: 99.27,12.747 99.27,14.825 cw(c101.81,14.825) 101.81,17.365 105.485,17.365 cw(c105.485,14.825) 108.025,14.825 108.025,10.126 cw(c105.485,10.126) 105.485,7.586 101.807,7.586 cw(c101.807,10.126) 99.267,10.126 99.267,12.747
  pour cut-out: 42.77,12.747 42.77,14.825 cw(c45.31,14.825) 45.31,17.365 48.985,17.365 cw(c48.985,14.825) 51.525,14.825 51.525,10.126 cw(c48.985,10.126) 48.985,7.586 45.307,7.586 cw(c45.307,10.126) 42.767,10.126 42.767,12.747
  pour cut-out: 42.77,28.747 42.77,30.825 cw(c45.31,30.825) 45.31,33.365 48.985,33.365 cw(c48.985,30.825) 51.525,30.825 51.525,26.126 cw(c48.985,26.126) 48.985,23.586 45.307,23.586 cw(c45.307,26.126) 42.767,26.126 42.767,28.747
  pour cut-out: 42.77,78.247 42.77,80.325 cw(c45.31,80.325) 45.31,82.865 48.985,82.865 cw(c48.985,80.325) 51.525,80.325 51.525,75.626 cw(c48.985,75.626) 48.985,73.086 45.307,73.086 cw(c45.307,75.626) 42.767,75.626 42.767,78.247
  pour cut-out: 42.77,94.247 42.77,96.325 cw(c45.31,96.325) 45.31,98.865 48.985,98.865 cw(c48.985,96.325) 51.525,96.325 51.525,91.626 cw(c48.985,91.626) 48.985,89.086 45.307,89.086 cw(c45.307,91.626) 42.767,91.626 42.767,94.247
  pour cut-out: 98.953,60.9 98.953,45.103 51.875,45.103 51.875,60.998
Board Outline:
  lines w0.01: 64.11,22.254 64.11,22.254 ; 64.11,36.954 64.11,36.954
  lines w0.013: 37.368,10.258 cw(c44.472,10.627) 37.358,10.627 37.358,96.127 cw(c44.474,96.127) 37.367,96.484 cw(c44.36,96.126) 43.502,103.075 cw(c44.354,96.086) 43.989,103.117 cw(c44.358,96.013) 44.358,103.127 106.858,103.127 cw(c106.859,96.012) 107.216,103.118 cw(c106.857,96.125) 113.806,96.983 cw(c106.818,96.131) 113.849,96.496 cw(c106.744,96.127) 113.858,96.127 113.858,10.627 cw(c106.743,10.627) 113.849,10.27 cw(c106.857,10.628) 107.715,3.679 cw(c106.863,10.668) 107.227,3.637 cw(c106.859,10.741) 106.858,3.627 44.358,3.627 cw(c44.358,10.742) 44.001,3.636 cw(c44.359,10.629) 37.41,9.771 cw(c44.399,10.623) 37.368,10.258 ; 64.11,22.254 cw(c65.609,22.177) 65.425,23.666 cw(c65.607,22.168) 65.529,23.675 cw(c65.608,22.153) 65.608,23.677 82.608,23.677 ccw(c82.608,25.201) 82.687,23.679 ccw(c82.609,25.186) 82.792,23.688 ccw(c82.608,25.177) 84.106,25.1 ccw(c82.584,25.177) 84.108,25.177 84.108,33.877 ccw(c82.584,33.877) 84.106,33.956 ccw(c82.6,33.878) 84.097,34.061 ccw(c82.608,33.877) 82.685,35.375 ccw(c82.608,33.852) 82.608,35.377 65.608,35.377 cw(c65.608,36.902) 65.532,35.379 cw(c65.608,36.877) 64.119,36.693 cw(c65.617,36.876) 64.11,36.798 64.11,36.954 ; 64.11,36.954 cw(c65.609,36.877) 65.425,38.366 cw(c65.607,36.868) 65.529,38.375 cw(c65.608,36.853) 65.608,38.377 85.608,38.377 cw(c85.608,36.852) 85.685,38.375 cw(c85.608,36.877) 87.097,37.061 cw(c85.6,36.878) 87.106,36.956 cw(c85.584,36.877) 87.108,36.877 87.108,22.177 cw(c85.584,22.177) 87.106,22.1 cw(c85.608,22.177) 85.792,20.688 cw(c85.609,22.186) 85.687,20.679 cw(c85.608,22.201) 85.608,20.677 65.608,20.677 cw(c65.608,22.202) 65.532,20.679 cw(c65.608,22.177) 64.119,21.993 cw(c65.617,22.176) 64.11,22.098 64.11,22.254 ; 53.608,47.877 ccw(c55.133,47.877) 53.61,47.798 ccw(c55.117,47.876) 53.619,47.693 ccw(c55.108,47.877) 55.032,46.379 ccw(c55.108,47.902) 55.108,46.377 82.108,46.377 ccw(c82.108,47.901) 82.187,46.379 ccw(c82.109,47.886) 82.292,46.388 ccw(c82.108,47.877) 83.606,47.8 ccw(c82.084,47.877) 83.608,47.877 83.608,58.877 ccw(c82.084,58.877) 83.606,58.956 ccw(c82.1,58.878) 83.597,59.061 ccw(c82.108,58.877) 82.185,60.375 ccw(c82.108,58.852) 82.108,60.377 55.108,60.377 ccw(c55.108,58.853) 55.029,60.375 ccw(c55.107,58.868) 54.925,60.366 ccw(c55.109,58.877) 53.61,58.954 ccw(c55.133,58.877) 53.608,58.877 ccw(c55.133,58.877) 53.61,58.798 ccw(c55.117,58.876) 53.619,58.693 ccw(c55.108,58.877) 55.032,57.379 ccw(c55.108,58.902) 55.108,57.377 80.008,57.377 80.008,49.377 55.108,49.377 ccw(c55.108,47.853) 55.029,49.375 ccw(c55.107,47.868) 54.925,49.366 ccw(c55.109,47.877) 53.61,47.954 ccw(c55.133,47.877) 53.608,47.877 ; 64.108,69.877 ccw(c65.633,69.877) 64.11,69.798 ccw(c65.617,69.876) 64.119,69.693 ccw(c65.608,69.877) 65.532,68.379 ccw(c65.608,69.902) 65.608,68.377 85.608,68.377 ccw(c85.608,69.901) 85.687,68.379 ccw(c85.609,69.886) 85.792,68.388 ccw(c85.608,69.877) 87.106,69.8 ccw(c85.584,69.877) 87.108,69.877 87.108,84.577 ccw(c85.584,84.577) 87.106,84.656 ccw(c85.6,84.578) 87.097,84.761 ccw(c85.608,84.577) 85.685,86.075 ccw(c85.608,84.552) 85.608,86.077 65.608,86.077 ccw(c65.608,84.553) 65.529,86.075 ccw(c65.607,84.568) 65.425,86.066 ccw(c65.609,84.577) 64.11,84.654 ccw(c65.633,84.577) 64.108,84.577 ccw(c65.633,84.577) 64.11,84.498 ccw(c65.617,84.576) 64.119,84.393 ccw(c65.608,84.577) 65.532,83.079 ccw(c65.608,84.602) 65.608,83.077 82.608,83.077 cw(c82.608,81.552) 82.685,83.075 cw(c82.608,81.577) 84.097,81.761 cw(c82.6,81.578) 84.106,81.656 cw(c82.584,81.577) 84.108,81.577 84.108,72.877 cw(c82.584,72.877) 84.106,72.8 cw(c82.608,72.877) 82.792,71.388 cw(c82.609,72.886) 82.687,71.379 cw(c82.608,72.901) 82.608,71.377 65.608,71.377 ccw(c65.608,69.853) 65.529,71.375 ccw(c65.607,69.868) 65.425,71.366 ccw(c65.609,69.877) 64.11,69.954 ccw(c65.633,69.877) 64.108,69.877